# EAGLE board T41_TPad (EAGLE 9.6.2)
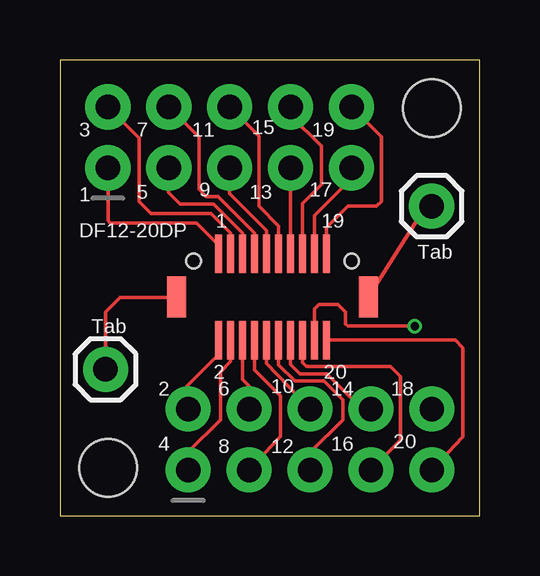
[diagram p0: board, top side]
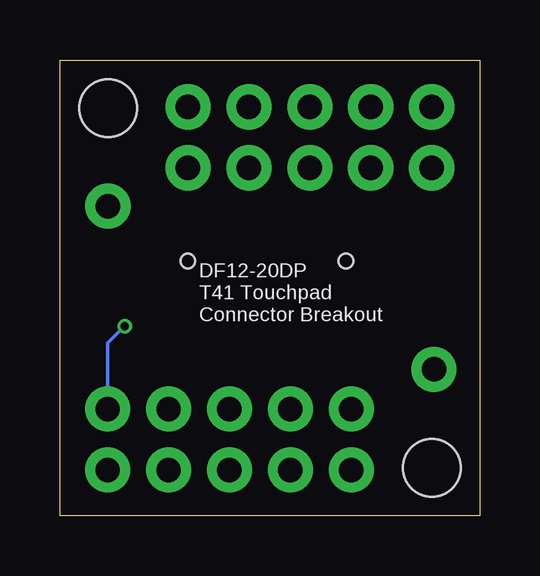
[diagram p1: board, bottom side, seen from below]

Size 17.5 x 19 mm. Coordinates in mm from the lower left corner, seen from the top.
Outline: 0,0 17.5,0 17.5,19 0,19 0,0
Copper layers (1*16): Top 0.035559375mm / dielectric 1.6mm / Bottom 0.035559375mm
Design rules "oshpark-2layer": minimum track width 6mil, minimum drill 10mil, track to track 6mil, track to pad 6mil, pad to pad 6mil, via to via 6mil, smd to smd 6mil, copper to edge 15mil, drill to drill 6mil, minimum pad ring 5mil, minimum via ring 5mil, stop-mask expansion 2.5mil, vias tented up to drill 0mil, thermal gap 10mil
Holes 2.4 mm at 2,2 15.5,17

## Footprints (pad centres in the part's own frame; a part is rotated, then mirrored left to right if it is on the bottom)
DF12-20DP = smd 0.3 x 1.6: 1 0,1.8; 2 0,-1.8; 3 0.5,1.8; 4 0.5,-1.8; 5 1,1.8; 6 1,-1.8; 7 1.5,1.8; 8 1.5,-1.8; 9 2,1.8; 10 2,-1.8; 11 2.5,1.8; 12 2.5,-1.8; 13 3,1.8; 14 3,-1.8; 15 3.5,1.8; 16 3.5,-1.8; 17 4,1.8; 18 4,-1.8; 19 4.5,1.8; 20 4.5,-1.8 | smd 0.8 x 1.7: TAB1 -1.75,0; TAB2 6.25,0 | hole 0.6: -1.05,1.5; 5.55,1.5
2X5_NOSILK = drill 1.016 pad 1.88: 1 0,0; 2 0,2.54; 3 2.54,0; 4 2.54,2.54; 5 5.08,0; 6 5.08,2.54; 7 7.62,0; 8 7.62,2.54; 9 10.16,0; 10 10.16,2.54
1X01 = drill 1.016 pad 1.88: 1 0,0

## Placement (x,y rotation side)
J1  [DF12-20DP]  6.62,9.12 0 top
J2  [2X5_NOSILK]  5.35,1.9 0 top
J3  [2X5_NOSILK]  2,14.5 0 top
J4  [1X01]  1.9,6.1 0 top
J5  [1X01]  15.5,12.9 0 top

## Library data of the parts
J1 = DF12-20DP
J2-J5 = SparkFun-Connectors

## Nets
N$1: J1.19 J3.10
N$2: J1.3 J3.2
N$3: J1.1 J3.1
N$4: J1.5 J3.3
N$5: J1.7 J3.4
N$6: J1.9 J3.5
N$7: J1.11 J3.6
N$8: J1.13 J3.7
N$9: J1.15 J3.8
N$10: J1.17 J3.9
N$11: J1.2 J2.2
N$12: J1.4 J2.1
N$13: J1.6 J2.4
N$14: J1.8 J2.3
N$15: J1.10 J2.6
N$16: J1.12 J2.5
N$17: J1.14 J2.8
N$18: J1.16 J2.7
N$19: J1.18 J2.10
N$20: J1.20 J2.9
N$21: J1.TAB1 J4.1
N$22: J1.TAB2 J5.1

## Tracks (layer width: path | path; a pad name or v marks a point on that pad's centre or on a via)
N$1
  Top 0.152: J1.19 11.12,12.02 12,12.9 13.2,12.9 13.4,13.1 13.4,15.8 J3.10
N$2
  Top 0.152: J1.3 7.12,11.78 6.3,12.6 3.8,12.6 3.3,13.1 3.3,15.74 J3.2
N$3
  Top 0.152: J1.1 6.62,11.28 5.7,12.2 2.1,12.2 2,12.3 J3.1
N$4
  Top 0.152: J1.5 7.62,11.78 6.4,13 5,13 4.54,13.46 J3.3
N$5
  Top 0.152: J1.7 8.12,11.78 6.59,13.3 6.1,13.3 5.8,13.61 5.8,15.78 J3.4
N$6
  Top 0.152: J1.9 8.62,11.88 7.08,13.42 J3.5
N$7
  Top 0.152: J1.11 9.12,12.08 8.3,12.9 8.3,15.82 J3.6
N$8
  Top 0.152: J1.13 J3.7
N$9
  Top 0.152: J1.15 10.12,13.02 10.9,13.8 10.9,15.4 9.62,16.68 J3.8
N$10
  Top 0.152: J1.17 10.62,12.52 12.16,14.06 J3.9
N$11
  Top 0.152: J1.2 6.62,6.72 5.3,5.4 5.3,4.59 J2.2
N$12
  Top 0.152: J2.1 5.35,2.65 6.7,4 6.7,6 7.12,6.42 J1.4
N$13
  Top 0.152: J2.4 7.89,5.41 7.62,5.68 J1.6
N$14
  Top 0.152: J2.3 9.2,3.31 9.2,5 8.12,6.08 J1.8
N$15
  Top 0.152: J2.6 8.62,6.35 J1.10
N$16
  Top 0.152: J2.5 10.43,2.63 11.8,4 11.8,4.82 11.01,5.61 9.79,5.61 9.12,6.28 J1.12
N$17
  Top 0.152: J1.14 9.62,6.29 10,5.91 11.14,5.91 12.51,4.54 J2.8
N$18
  Top 0.152: J1.16 10.12,6.38 10.28,6.22 13.78,6.22 14.2,5.8 14.2,3.13 J2.7
N$19  (via drill 0.35)
  Top 0.152: J1.18 10.62,8.62 10.8,8.8 11.6,8.8 11.9,8.5 11.9,8 12,7.9 v14.8,7.9
  Bottom 0.152: v14.8,7.9 15.51,7.19 J2.10
N$20
  Top 0.152: J2.9 16.8,3.28 16.8,7 16.48,7.32 J1.20
N$21
  Top 0.152: J1.TAB1 4.85,9.1 2.5,9.1 1.9,8.5 J4.1
N$22
  Top 0.152: J5.1 15.29,12.97 J1.TAB2

## Text on the board
tPlace: 3 | 7 | 11 | 15 | 19 | 1 | 5 | 9 | 13 | 17 | DF12-20DP | 1 | 19 | Tab | Tab | 2 | 20 | 2 | 6 | 10 | 14 | 18 | 4 | 8 | 12 | 16 | 20
bPlace: DF12-20DP / T41 Touchpad / Connector Breakout